# Altium PCB buso.PcbDoc
Units mm, origin at the board's own origin, x right, y up, seen from the top; angles counter-clockwise.
Board outline 151 x 86.38 mm, 2 copper layers (Top Layer, Bottom Layer); 57 components, 60 nets, 214 pads, 0 vias.
Unrouted connection lines stored in the file: 66.
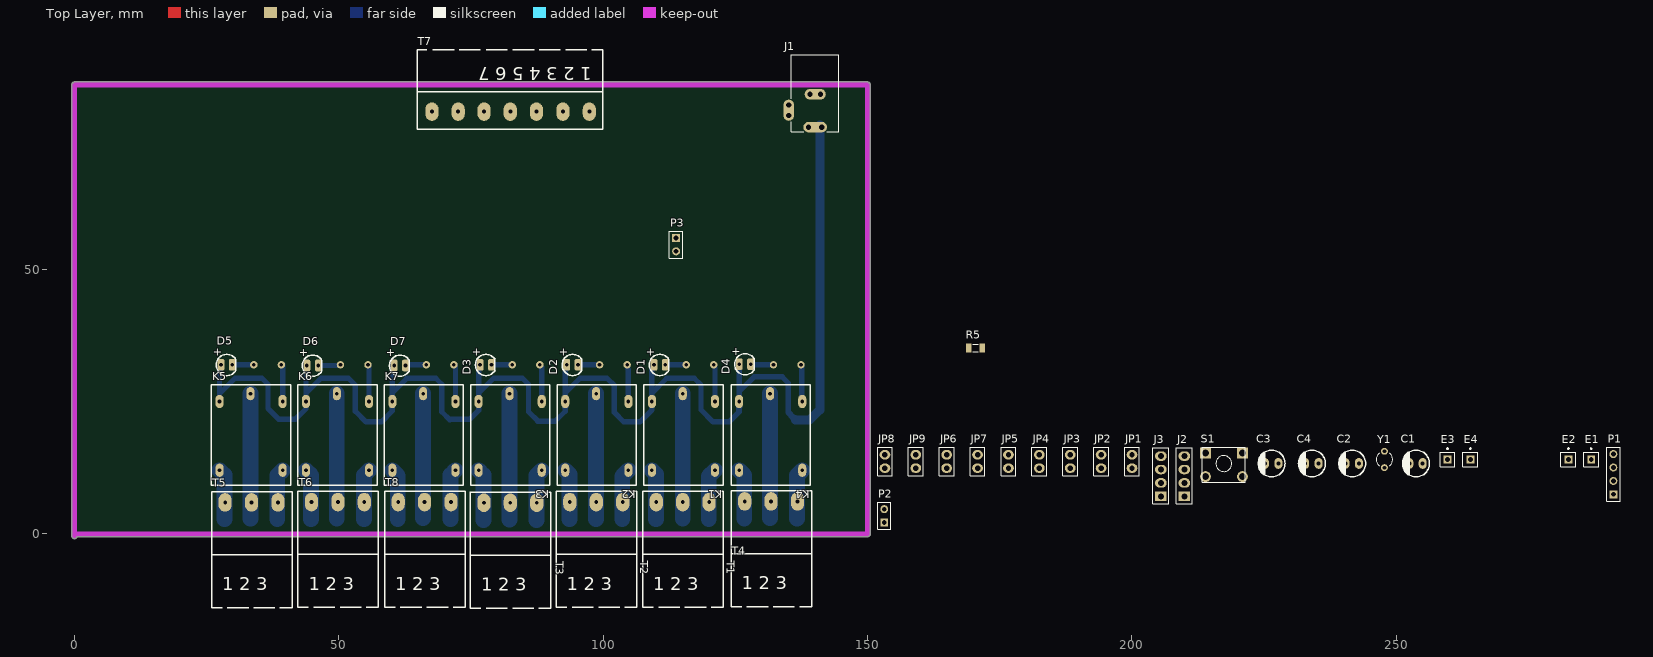
[diagram p0: Top Layer view]
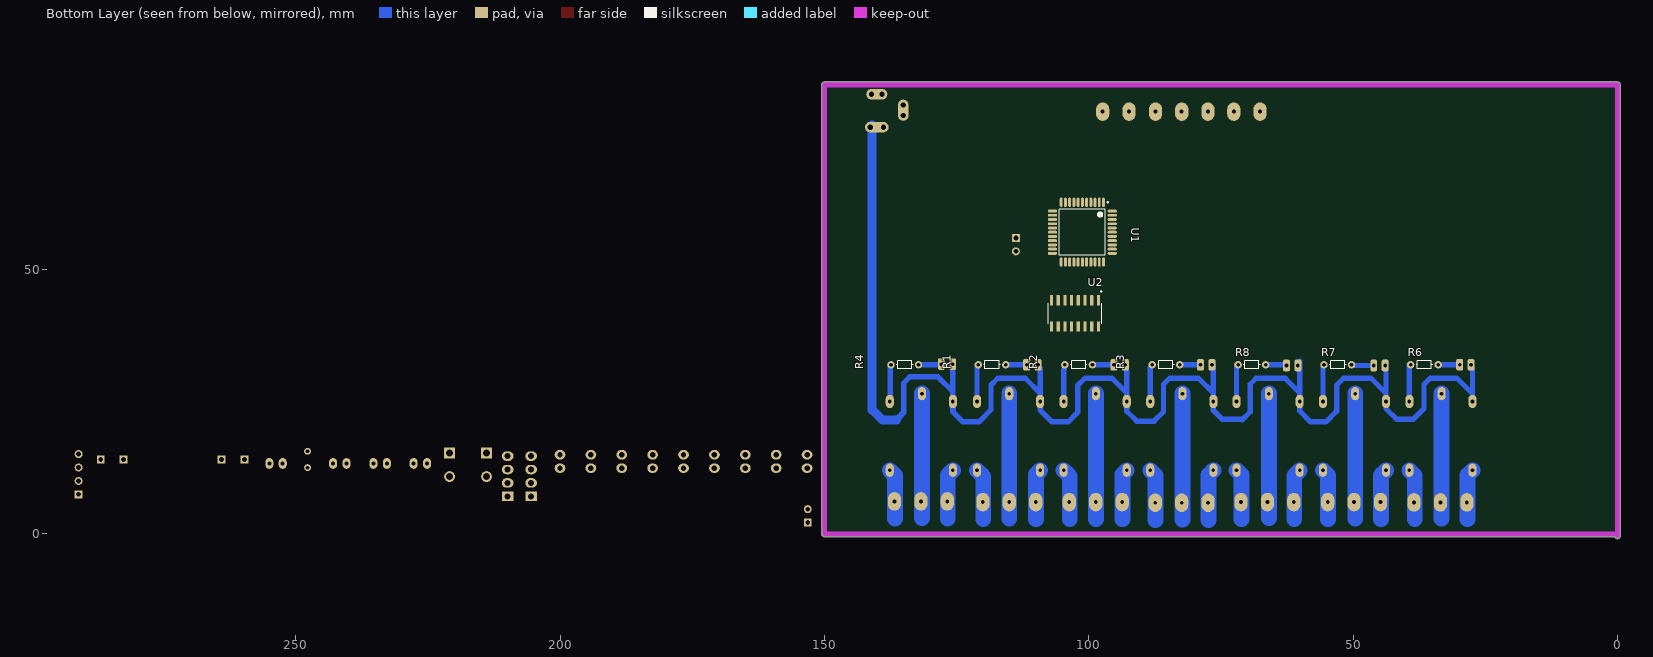
[diagram p1: Bottom Layer view, seen from below]

## Layer stack, top to bottom
Top Solder: solder mask 0.0102, Solder Resist, Dk 3.5
Top Layer: signal copper 0.0356
Dielectric 1: dielectric 0.32, FR-4, Dk 4.8
Bottom Layer: signal copper 0.0356
Bottom Solder: solder mask 0.0102, Solder Resist, Dk 3.5

## Board outline
-0.5,-0.381 -0.5,85 cw(c0,85) 0,85.5 150,85.5 cw(c150,85) 150.5,85 150.5,0 cw(c150,0) 150,-0.5 0.486,-0.5 cw(c0,-0.381)

## Design rules (kind name [scope] priority, off if disabled: settings)
Clearance Clearance_1 [InPolygon] p1: gap=0.8 ignorepadtopadclearanceinfootprint=FALSE
Clearance [All] p2: gap=0.254 ignorepadtopadclearanceinfootprint=FALSE except(0: Arc-Hole Track-Hole SMDPad-Hole THPad-Hole Via-Hole Fill-Hole Poly-Hole Region-Hole Text-Hole)
PolygonConnect [All] p1: connectstyle=Relief reliefconductorwidth=0.254 reliefentries=4 polygonreliefangle="90 Angle" airgapwidth=0.254
RoomDefinition buso [InComponentClass('buso')] p1: confinementstyle=ConfineIn formatcopy=TRUE lockcomponents=FALSE outline 144.907,-4.953 247.904,-4.953 247.904,23.114 144.907,23.114
RoutingLayers [All] p1: top layer_v5=FALSE bottom layer_v5=TRUE
RoutingVias [All] p1: holewidth=0.711 width=2.5 viastyle="Through Hole" minholewidth=0.711 minwidth=1.27 maxholewidth=0.711 maxwidth=2
SolderMaskExpansion [All] p1: expansion=0.102 istentingtop=FALSE
Width [All] p1: maxlimit=3 minlimit=0.5 preferedwidth=1
29 further rules are at their usual default settings.

## Components (designator, comment, footprint, x,y, rotation, side; value= is the part's Value field where it differs from the comment)
C1 "=Value" ELEC-CAP-RAD10-20 253.746,13.335 r0 top
C2 "=Value" ELEC-CAP-RAD10-20 241.681,13.335 r0 top
C3 "=Value" ELEC-CAP-RAD10-20 226.441,13.335 r0 top
C4 "=Value" ELEC-CAP-RAD10-20 234.061,13.335 r0 top
D1 "LED 3mm" LED-3mm 110.617,31.877 r90 top
D2 "LED 3mm" LED-3mm 94.107,31.877 r90 top
D3 "LED 3mm" LED-3mm 77.724,31.877 r90 top
D4 "LED 3mm" LED-3mm 126.746,32.004 r90 top
D5 "LED 3mm" LED-3mm 28.702,31.877 r90 top
D6 "LED 3mm" LED-3mm 44.958,31.75 r90 top
D7 "LED 3mm" LED-3mm 61.468,31.75 r90 top
E1 "Antenna" PIN1 286.893,14.097 r0 top
E2 "Antenna" PIN1 282.575,14.097 r0 top
E3 "Antenna" PIN1 259.715,14.097 r0 top
E4 "Antenna" PIN1 264.033,14.097 r0 top
J1 "PWR2.5" KLD-0202 140.101,90.662 r270 top
J2 "Header4X1" "HEADER 4X1" 209.931,7.112 r90 top
J3 "Header4X1" "HEADER 4X1" 205.486,7.112 r90 top
JP1 "Jumper" "Header 2X1" 200.025,13.716 r90 top
JP2 "Jumper" "Header 2X1" 194.183,13.716 r90 top
JP3 "Jumper" "Header 2X1" 188.341,13.716 r90 top
JP4 "Jumper" "Header 2X1" 182.499,13.716 r90 top
JP5 "Jumper" "Header 2X1" 176.657,13.716 r90 top
JP6 "Jumper" "Header 2X1" 164.973,13.716 r90 top
JP7 "Jumper" "Header 2X1" 170.815,13.716 r90 top
JP8 "Jumper" "Header 2X1" 153.289,13.716 r90 top
JP9 "Jumper" "Header 2X1" 159.131,13.716 r90 top
K1 "Relay-12vDC" Relays 122.665,28.194 r180 top
K2 "Relay-12vDC" Relays 106.282,28.194 r180 top
K3 "Relay-12vDC" Relays 89.899,28.194 r180 top
K4 "Relay-12vDC" Relays 139.175,28.194 r180 top
K5 "Relay-12vDC" Relays 40.884,28.194 r180 top
K6 "Relay-12vDC" Relays 57.225,28.194 r180 top
K7 "Relay-12vDC" Relays 73.565,28.194 r180 top
P1 "Header 4" HDR1X4 291.084,7.493 r90 top
P2 "Header 2" HDR1X2 153.162,2.159 r90 top
P3 "Header 2" HDR1X2 113.792,56.007 r270 top
R1 "Res2" Res50 119.507,32.004 r0 bottom value=1K
R2 "Res2" Res50 103.124,32.004 r0 bottom value=1K
R3 "Res2" Res50 86.614,32.004 r0 bottom value=1K
R4 "Res2" Res50 136.017,32.004 r0 bottom value=1K
R5 "10K" "RES 1206 (3216X08L)" 170.434,35.179 r0 top
R6 "Res2" Res50 37.719,32.004 r0 bottom value=1K
R7 "Res2" Res50 54.102,32.004 r0 bottom value=1K
R8 "Res2" Res50 70.358,32.004 r0 bottom value=1K
S1 "PUSH BUTTON DOUBLE" "PUSH BUTTON" 217.424,13.081 r0 top
T1 "Terminal" "phoenix terminal R 3" 107.465,-13.906 r0 top
T2 "Terminal" "phoenix terminal R 3" 91.115,-13.906 r0 top
T3 "Terminal" "phoenix terminal R 3" 74.859,-14.033 r0 top
T4 "Terminal" "phoenix terminal R 3" 124.182,-13.779 r0 top
T5 "Terminal" "phoenix terminal R 3" 25.908,-13.97 r0 top
T6 "Terminal" "phoenix terminal R 3" 42.243,-13.906 r0 top
T7 "Phoenix terminal" "phoenix terminal 7" 99.869,91.567 r180 top
T8 "Terminal" "phoenix terminal R 3" 58.641,-13.906 r0 top
U1 "ATmega16-16AC" 44A_N 101.219,57.085 r270 bottom
U2 "ULN2003ADRG4" SOIC127P600X175-16N 102.616,41.721 r270 bottom
Y1 "XTAL" R38 247.777,14.097 r0 top

## Footprints (in the part's own frame and the unit in brackets; to place one, negate y for a bottom-side part, rotate by r counter-clockwise, add the part's x,y. Pads: shape width x height; smd on the part's side, far side on the other; paste and mask are expansions set on the pad)
44A_N [mm] "Thin QFP, 44-Leads, Body 10x10mm, Pitch 0.8mm, IPC Medium Density"
  oval 1.75x0.55 smd: 1(-5.65,4) 2(-5.65,3.2) 3(-5.65,2.4) 4(-5.65,1.6) 5(-5.65,0.8) 6(-5.65,0) 7(-5.65,-0.8) 8(-5.65,-1.6) 9(-5.65,-2.4) 10(-5.65,-3.2) 11(-5.65,-4) 23(5.65,-4) 24(5.65,-3.2) 25(5.65,-2.4) 26(5.65,-1.6) 27(5.65,-0.8) 28(5.65,0) 29(5.65,0.8) 30(5.65,1.6) 31(5.65,2.4) 32(5.65,3.2) 33(5.65,4)
  oval 0.55x1.75 smd: 12(-4,-5.65) 13(-3.2,-5.65) 14(-2.4,-5.65) 15(-1.6,-5.65) 16(-0.8,-5.65) 17(0,-5.65) 18(0.8,-5.65) 19(1.6,-5.65) 20(2.4,-5.65) 21(3.2,-5.65) 22(4,-5.65) 34(4,5.65) 35(3.2,5.65) 36(2.4,5.65) 37(1.6,5.65) 38(0.8,5.65) 39(0,5.65) 40(-0.8,5.65) 41(-1.6,5.65) 42(-2.4,5.65) 43(-3.2,5.65) 44(-4,5.65)
  silkscreen extent -5.77,-4.35 4.35,4.95, body extent -5,-5 5,5, height 1.2
ELEC-CAP-RAD10-20 [mil]
  oval 60x80 hole 30: 1(-50,0) 2(50,0)
  silkscreen extent -100,-100 100,100, body extent -124,-124 124,124, height 404
HDR1X2 [mm] "Connector; Header; 2 Position"
  rect 1.5x1.5 hole 0.9: 1(0,0)
  round 1.5 hole 0.9: 2(2.54,0)
  silkscreen extent -1.27,-1.27 3.81,1.27
HDR1X4 [mm] "Connector; Header; 4 Position"
  rect 1.5x1.5 hole 0.9: 1(0,0)
  round 1.5 hole 0.9: 2(2.54,0) 3(5.08,0) 4(7.62,0)
  silkscreen extent -1.27,-1.27 8.89,1.27
"Header 2X1" [mil]
  oval 70x80 hole 40: 1(-50,0) 2(50,0)
  silkscreen extent -105,-55 105,55, body extent -100,-50 100,50, height 374
"HEADER 4X1" [mm]
  rect 1.8x2.2 hole 1.1: 1(0,0)
  oval 1.8x2.2 hole 1.1: 2(2.54,0) 3(5.08,0) 4(7.62,0)
  silkscreen extent -1.43,-1.5 9.18,1.5, body extent -1.19,-1.22 8.97,1.32, height 8.38
KLD-0202 [mm] "DC Power Jack, 2.5mm, KLD Series, PCB Mount"
  oval 2x4.5 all layers, no hole: 1(13.7,0)
  round 1.5 hole 1: 1A(13.7,-1.25) 1B(13.7,1.25) 2A(7.5,-1) 2B(7.5,1) 3A(9.5,-5) 3B(11.5,-5)
  oval 2x4 all layers, no hole: 2(7.5,0)
  oval 4x2 all layers, no hole: 3(10.5,-5)
  silkscreen extent 0,-4.5 14.6,4.5
LED-3mm [mm] "LED; 2 Leads"
  rrect50% 2.2x1.3 hole 0.7: 1(0.127,1.016) 2(0.127,-1.143)
  silkscreen extent -1.9,-1.81 2.09,1.89
"phoenix terminal 7" [mil] "7 terminals"
  oval 98.43x137.8 hole 30: 1(98.15,460) 2(295,460) 3(491.85,460) 4(686.85,460) 5(881.85,460) 6(1075,460) 7(1270,460)
  silkscreen extent 0,0 1380,591
"phoenix terminal R 3" [mm] "3 Right terminals"
  oval 2.5x3.5 hole 0.7: 1(2.573,19.939) 2(7.573,19.939) 3(12.573,19.939)
  silkscreen extent 0,0 15.24,22
PIN1 [mm] "Generic Antenna; 1 Lead"
  rect 1.5x1.5 hole 0.9: 1(0,0)
  silkscreen extent -1.4,-1.4 1.4,2.17
"PUSH BUTTON" [mil]
  rect 80x80 hole 50: 1(-137.5,87.5) 2(137.5,87.5)
  round 80 hole 50: 3(-137.5,-87.5) 4(137.5,-87.5)
  silkscreen extent -160,-130 160,130, body extent -155,-121 157,123, height 205
R38 [mm] "Crystal, Thru-Hole; 2 Leads; Body 3.1 x 8.2 mm (Dia.xH)"
  round 1.3 hole 0.7: 1(0,1.55) 2(0,-1.55)
  silkscreen extent -1.55,-1.19 1.55,1.17
Relays [mil]
  oval 60x98.43 hole 27.56: 1(300,65) 2(60,635) 3(530,635) 4(60,123.11) 5(530,123.11)
  silkscreen extent 0,0 591,748
Res50 [mm] "50mm Pin Spacing"
  round 1.4 hole 0.7: 1(-3.81,0) 2(1.397,0)
  silkscreen extent -2.77,-0.76 0.38,0.76
"RES 1206 (3216X08L)" [mm] "Chip Resistor, 2-Leads, Body 3.2x1.6mm, IPC High Density _ (0.125 W)"
  rect 1.05x1.7 smd: 1(-1.295,0) 2(1.301,0)
  silkscreen extent -0.5,-0.75 0.5,0.75, body extent -1.52,-0.76 1.53,0.76, height 0.6
SOIC127P600X175-16N [mm]
  rrect25% 1.97x0.6 smd: 1(-2.475,4.445) 2(-2.475,3.175) 3(-2.475,1.905) 4(-2.475,0.635) 5(-2.475,-0.635) 6(-2.475,-1.905) 7(-2.475,-3.175) 8(-2.475,-4.445) 9(2.475,-4.445) 10(2.475,-3.175) 11(2.475,-1.905) 12(2.475,-0.635) 13(2.475,0.635) 14(2.475,1.905) 15(2.475,3.175) 16(2.475,4.445)
  silkscreen extent -4.24,-5.06 1.95,5.06

## Part data
C1 C2 C3 C4: library part "Capacitor Electrolytic", "Electrolytic Capacitor"
D1 D2 D3 D4 D5 D6 D7: "Typical LED", Designer="Seyed Mohsen Ghasemian", PackageDescription="LED; 2 Leads", PackageReference=LED, Published=02/04/2012, Publisher=www.picpars.com
E1 E2 E3 E4: "Generic Antenna", LatestRevisionDate=17-Jul-2002, LatestRevisionNote="Re-released for DXP Platform.", PackageReference=PIN1, Published=24-Mar-1999, Publisher="Altium Limited"
J1: "Low Voltage Power Supply Connector", ComponentLink1Description="Manufacturer Link", ComponentLink1URL=http://domino.kycon.com/internet/Products.html, DatasheetDocument=09-May-2002, Published=17-Dec-2003, Publisher="Altium Limited"
K1 K2 K3 K4 K5 K6 K7: library part Relay-05vDC, "Relay-05vDC-240AC 5A", ComponentLinkURL=www.picpars.com, Designer="Seyed Mohsen Ghasemain"
P1: "Header, 4-Pin", LatestRevisionDate=17-Jul-2002, LatestRevisionNote="Re-released for DXP Platform.", Publisher="Altium Limited"
P2 P3: "Header, 2-Pin", LatestRevisionDate=17-Jul-2002, LatestRevisionNote="Re-released for DXP Platform.", Publisher="Altium Limited"
R1 R2 R3 R4 R6 R7 R8: "Resistor", LatestRevisionDate=17-Jul-2002, LatestRevisionNote="Re-released for DXP Platform.", PackageDescription="Axial Device, Thru-Hole; 2 Leads; 0.4 in Pin Spacing", Published=8-Jun-2000, Publisher="Altium Limited"
  R1 R2 R3 R4 R6 R7: PackageReference=AXIAL-0.4
  R8: PackageReference=Res50
R5: library part Resistor, "Resistor", Power="1/4 W", Tolerance=5%
S1: "Switch"
T1 T2 T3 T4 T5 T6 T8: library part "Terminal 1*3", "phoenix terminal R 3", ComponentLinkURL=www.picpars.com, Designer="Seyed Mohsen Ghasemain", E-mail=picpars@gmail.com
T7: library part "Phoenix terminal 7", "Terminal 7 Pin", ComponentLinkURL=www.picpars.com, Designer="Seyed Mohsen Ghasemain", E-mail=picpars@gmail.com
U1: "8-Bit AVR Microcontroller with 16K Bytes of In-System Programmable Flash Memory", Supplier Part Number 1=ATMEGA16-16AC-ND, ComponentLink1Description=Datasheet, ComponentLink1URL=http://www.atmel.com/dyn/resources/prod_documents/doc2466.pdf, ComponentLink2Description="Atmel.com Home", ComponentLink2URL=http://www.atmel.com, DatasheetVersion=2466E-AVR-10/02, LatestRevisionDate=16-Oct-2006, LatestRevisionNote="IPC-7351 Footprint Added.", PackageDescription="44-Pin Plastic Thin Profile Quad Flat Pack, 10 x 10 x 1.0 mm Body, 0.8 mm Pitch (TQFP)", PackageReference=44A, PackageVersion="rev.B, Oct-2001", Published=17-Sep-2003, Publisher="Altium Limited", Supplier 1=Digi-Key, Supplier 2=Mouser, Supplier Part Number 2=556-ATMEGA16-16AC
U2: "50-V, 7-ch darlington transistor array, -20C to 70C 16-SOIC -40 to 70", Package=None, Availability=Unavailable, MP=ULN2003ADRG4, Price=None
Y1: "Crystal Oscillator", LatestRevisionDate=17-Jul-2002, LatestRevisionNote="Re-released for DXP Platform.", PackageDescription="Crystal, Thru-Hole; 2 Leads; Body 3.1 x 8.2 mm (Dia.xH)", PackageReference=R38, Published=8-Jun-2000, Publisher="Altium Limited"

## Nets (pads, with @x,y where several pads share a name; then routed paths per layer and width w, separated by ;. In a path a pad name is that pad's centre, name@x,y a point inside that pad or via, vN(x,y) a via of type N, cw(c..) or ccw(c..) an arc to the next point about the centre after c; other vN are vias at no path point)
5v: C4.2 J2.1 JP8.1 JP8.2
btn: J2.2 JP2.1 JP2.2 S1.3
GND: C1.1 C2.1 C3.1 C4.1 E1.1 E2.1 J1.2 J1.2A J1.2B J1.3 J1.3A J1.3B J2.4 J3.4 JP5.1 JP5.2 JP9.1 JP9.2 P2.2 S1.2 S1.4 T7.7 U1.39 U2.9
i1: T7.1
i2: T7.2
i3: T7.3
i4: T7.4
i5: T7.5
i6: T7.6
NetC1_2: C1.2 U1.7 Y1.2
NetC2_2: C2.2 U1.8 Y1.1
NetD1_2: D1.2 R1.1 | length 4
  Bottom Layer w1: D1.2@111.76,32.154 111.91,32.004 R1.1
NetD2_2: D2.2 R2.1 | length 3.9
  Bottom Layer w1: D2.2@95.4,32.004 R2.1
NetD3_2: D3.2 R3.1 | length 4.1
  Bottom Layer w1: D3.2@78.717,32.004 R3.1
NetD4_2: D4.2 R4.1 | length 3.7
  Bottom Layer w1: D4.2 128.016,32.004 R4.1@131.572,32.004
NetD5_2: D5.2 R6.1 | length 4.1
  Bottom Layer w1: D5.2 R6.1
NetD6_2: D6.2 R7.1 | length 4.5
  Bottom Layer w1: D6.2 50.419,31.877 R7.1
NetD7_2: D7.2 R8.1 | length 4.1
  Bottom Layer w1: D7.2@62.484,32.004 R8.1
NetK1_1: K1.1 T1.2 | length 23.8
  Bottom Layer w2: 114.965,2.794 115.045,2.874
  Bottom Layer w3: 115.045,2.874 K1.1
NetK1_2: K1.2 T1.3 | length 9.8
  Bottom Layer w3: 119.965,2.794 119.965,10.889 K1.2
NetK1_3: K1.3 T1.1 | length 9.6
  Bottom Layer w3: K1.3 109.965,11.303 109.965,2.794
NetK2_1: K2.1 T2.2 | length 23.8
  Bottom Layer w2: 98.615,2.794 98.662,2.841
  Bottom Layer w3: 98.662,2.841 K2.1
NetK2_2: K2.2 T2.3 | length 9.7
  Bottom Layer w3: 103.615,2.794 103.615,10.922 K2.2
NetK2_3: K2.3 T2.1 | length 9.6
  Bottom Layer w3: K2.3 93.615,11.27 93.615,2.794
NetK3_1: K3.1 T3.2 | length 23.9
  Bottom Layer w2: 82.279,2.747 82.359,2.667
  Bottom Layer w3: 82.279,2.747 K3.1
NetK3_2: K3.2 T3.3 | length 9.8
  Bottom Layer w3: 87.359,2.667 87.359,11.049 K3.2
NetK3_3: K3.3 T3.1 | length 9.8
  Bottom Layer w3: K3.3 77.359,11.143 77.359,2.667
NetK4_1: K4.1 T4.2 | length 23.7
  Bottom Layer w2: 131.555,3.048 131.682,2.921
  Bottom Layer w3: 131.555,3.048 K4.1
NetK4_2: K4.2 T4.3 | length 9.5
  Bottom Layer w3: 136.682,2.921 136.682,11.096 K4.2
NetK4_3: K4.3 T4.1 | length 9.5
  Bottom Layer w3: K4.3 126.682,11.096 126.682,2.921
NetK5_1: K5.1 T5.2 | length 23.9
  Bottom Layer w2: 33.264,2.874 33.344,2.794 ; K5.1 K5.1@33.264,26.67
  Bottom Layer w3: 33.264,2.874 K5.1
NetK5_2: K5.2 T5.3 | length 9.8
  Bottom Layer w2: K5.2 K5.2@39.36,12.192
  Bottom Layer w3: 38.344,2.794 38.344,11.049 K5.2
NetK5_3: K5.3 T5.1 | length 9.8
  Bottom Layer w2: K5.3 K5.3@27.422,12.192
  Bottom Layer w3: K5.3 28.344,11.143 28.344,2.794
NetK6_1: K6.1 T6.2 | length 23.9
  Bottom Layer w2: 49.605,2.932 49.743,2.794 ; K6.1 K6.1@49.605,26.67
  Bottom Layer w3: 49.605,2.932 K6.1
NetK6_2: K6.2 T6.3 | length 9.8
  Bottom Layer w2: K6.2 K6.2@55.701,12.192
  Bottom Layer w3: 54.743,2.794 54.743,11.107 K6.2
NetK6_3: K6.3 T6.1 | length 9.8
  Bottom Layer w2: K6.3 K6.3@43.763,12.192
  Bottom Layer w3: K6.3 44.743,11.085 44.743,2.794
NetK7_1: K7.1 T8.2 | length 24
  Bottom Layer w2: 65.945,2.99 66.141,2.794 ; K7.1 K7.1@65.945,26.67
  Bottom Layer w3: 65.945,2.99 K7.1
NetK7_2: K7.2 T8.3 | length 9.8
  Bottom Layer w2: K7.2 K7.2@72.041,12.192
  Bottom Layer w3: 71.141,2.794 71.141,11.165 K7.2
NetK7_3: K7.3 T8.1 | length 9.8
  Bottom Layer w2: K7.3 K7.3@60.103,12.192
  Bottom Layer w3: K7.3 61.141,11.027 61.141,2.794
NetP3_1: P3.1 U1.19
NetP3_2: P3.2 U1.20
O1: U1.32 U2.1
O2: U1.31 U2.2
O3: U1.30 U2.3
o4: U1.26 U2.4
o5: U1.25 U2.5
o6: U1.24 U2.6
o7: U1.23 U2.7
oo1: K5.4 R6.2 U2.16 | length 7.3
  Bottom Layer w1: R6.2@39.064,32.164 39.36,32.004 K5.4
oo2: K6.4 R7.2 U2.15 | length 6.9
  Bottom Layer w1: K6.4 R7.2@55.701,32.004
oo3: K7.4 R8.2 U2.14 | length 6.9
  Bottom Layer w1: K7.4 R8.2@72.041,32.004
oo4: K3.4 R3.2 U2.13 | length 7.1
  Bottom Layer w1: R3.2 88.011,31.896 88.375,31.532 K3.4
oo5: K2.4 R2.2 U2.12 | length 7
  Bottom Layer w1: R2.2 104.598,31.927 104.598,31.292 104.758,31.132 K2.4
oo6: K1.4 R1.2 U2.11 | length 7
  Bottom Layer w1: R1.2 120.904,31.896 121.141,31.659 K1.4
oo7: K4.4 R4.2 U2.10 | length 7.1
  Bottom Layer w1: R4.2 137.541,32.004 137.541,25.807 137.651,25.697 K4.4
rst: JP1.1 JP1.2 P1.4 R5.2 S1.1 U1.4
rx: J3.1 U1.9
tx: J3.2 U1.10
VCC: C3.2 D1.1 D2.1 D3.1 D4.1 D5.1 D6.1 D7.1 E4.1 J1.1 J1.1A J1.1B JP3.1 JP3.2 JP6.1 JP6.2 K1.5 K2.5 K3.5 K4.5 K5.5 K6.5 K7.5 U2.8 | length 286
  Bottom Layer w1: K5.5 27.422,26.533 ; D5.1 27.536,31.854 27.536,31.001 27.422,30.888 27.422,26.533 ; D6.1@43.763,32.587 43.763,26.618 ; D7.1@60.103,32.671 60.103,28.194 60.103,26.702 ; 70.993,21.59 69.469,23.114 69.469,28.321 68.326,29.464 62.865,29.464 60.103,26.702 ; 71.12,21.717 74.803,21.717 76.437,23.351 K3.5 76.437,26.653 ; D3.1@76.437,32.004 76.437,26.653 ; D2.1@92.943,32.004 92.941,32.002 92.941,31.001 92.82,30.881 92.82,26.67 ; D1.1@109.451,32.108 109.451,31.658 109.203,31.41 109.203,26.653 ; D4.1@125.713,32.284 125.713,26.907 ; 136.398,21.59 135.001,22.987 135.001,28.575 133.858,29.718 128.524,29.718 125.713,26.907 ; 27.422,26.533 30.353,29.464 35.433,29.464 36.576,28.321 36.576,23.749 38.608,21.717 41.783,21.717 43.763,23.697 K6.5 43.763,26.618 ; 43.763,26.618 46.609,29.464 51.816,29.464 53.086,28.194 53.086,23.241 55.118,21.209 58.039,21.209 60.103,23.273 K7.5 60.103,26.702 ; 76.437,26.653 79.248,29.464 84.709,29.464 85.852,28.321 85.852,23.114 87.63,21.336 90.932,21.336 92.82,23.224 K2.5 92.82,26.67 ; 92.82,26.67 95.614,29.464 100.711,29.464 102.108,28.067 102.108,22.987 103.886,21.209 106.934,21.209 109.203,23.478 K1.5 109.203,26.653 ; 109.203,26.653 112.014,29.464 117.221,29.464 118.491,28.194 118.491,23.495 120.777,21.209 123.825,21.209 125.713,23.097 K4.5 125.713,26.907
  Bottom Layer w1.7: 136.398,21.59 139.065,21.59 140.97,23.495 J1.1@140.97,77.374
vDD: E3.1 J3.3 JP4.1 JP4.2 JP7.1 JP7.2 P2.1 R5.1
pads on no net: J2.3 P1.1 P1.2 P1.3 U1.1 U1.2 U1.3 U1.5 U1.6 U1.11 U1.12 U1.13 U1.14 U1.15 U1.16 U1.17 U1.18 U1.21 U1.22 U1.27 U1.28 U1.29 U1.33 U1.34 U1.35 U1.36 U1.37 U1.38 U1.40 U1.41 U1.42 U1.43 U1.44

## Keep-outs
Keep-Out Layer:
  lines w1: 0,-0.381 0,85 150,85 150,0 0,0

## Text inside footprints (layer, text, board x,y; h text height)
D1: Top Overlay "+" at 109.855,35.052 h1.52 r180
D2: Top Overlay "+" at 93.345,35.052 h1.52 r180
D3: Top Overlay "+" at 76.962,35.052 h1.52 r180
D4: Top Overlay "+" at 125.984,35.179 h1.52 r180
D5: Top Overlay "+" at 27.94,35.052 h1.52 r180
D6: Top Overlay "+" at 44.196,34.925 h1.52 r180
D7: Top Overlay "+" at 60.706,34.925 h1.52 r180
J1: Mechanical 1 "Mech 2 - Clearance, move to internal plane if present" at 145.167,90.376 h0.3 r270; Mechanical 1 "Mech 1 - Slot cut-out" at 145.667,90.376 h0.3 r270; Mechanical 1 "Assign keep-out area to slot" at 146.667,90.376 h0.3 r270; Mechanical 1 "Alert PCB fab to slot details" at 146.167,90.376 h0.3 r270
T1: Top Overlay "1 2 3" at 109.497,-10.604 h2.5
T2: Top Overlay "1 2 3" at 93.147,-10.604 h2.5
T3: Top Overlay "1 2 3" at 76.891,-10.731 h2.5
T4: Top Overlay "1 2 3" at 126.214,-10.477 h2.5
T5: Top Overlay "1 2 3" at 27.94,-10.668 h2.5
T6: Top Overlay "1 2 3" at 44.275,-10.604 h2.5
T7: Top Overlay "1 2 3 4 5 6 7" at 97.837,88.265 h2.5 r180
T8: Top Overlay "1 2 3" at 60.673,-10.604 h2.5